# EAGLE board LCD Test board v2 (EAGLE 7.5.0)
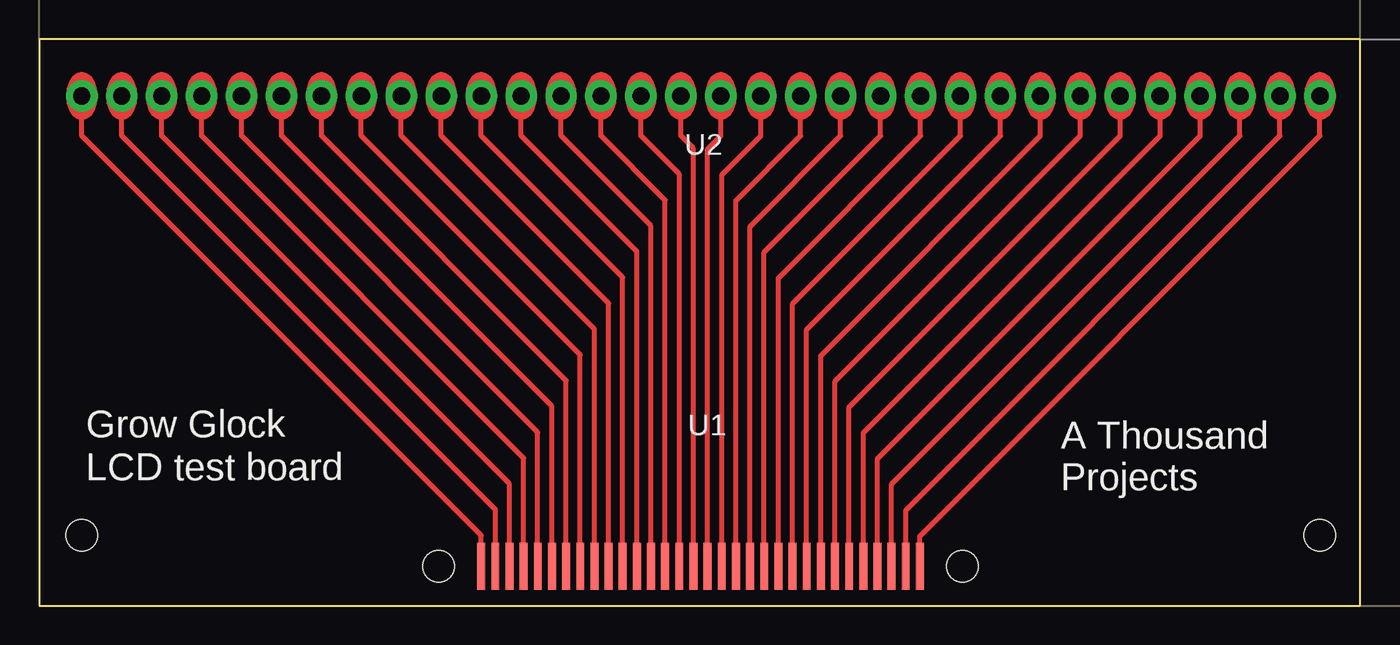
[diagram p0: board, top side]
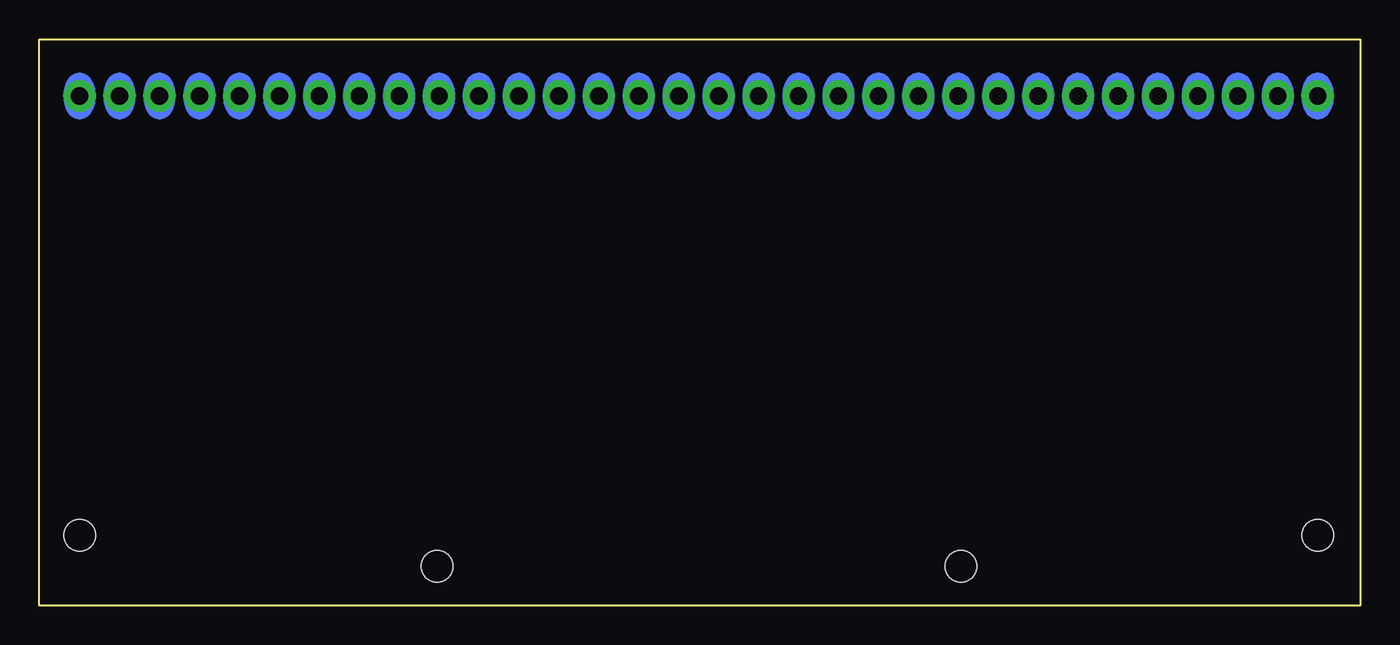
[diagram p1: board, bottom side, seen from below]

Size 84 x 36 mm. Coordinates in mm from the lower left corner, seen from the top.
Outline: 0,0 84,0 84,36 0,36 0,0
Copper layers (1++16): Top 0.035mm / dielectric 0mm / Bottom 0.035mm
Design rules "default *": minimum track width 10mil, minimum drill 0.61mm, track to track 8mil, track to pad 8mil, pad to pad 8mil, via to via 8mil, smd to smd 8mil, copper to edge 40mil, drill to drill 8mil, minimum pad ring 0mil, minimum via ring 8mil, stop-mask expansion 4mil, vias tented up to drill 19mil, thermal gap 10mil
Net classes: 0 Default: width 0.33 mm, clearance 0.33 mm
Holes 2 mm at 58.7,2.5 25.4,2.5 81.44,4.46 2.7,4.46

## Footprints (pad centres in the part's own frame; a part is rotated, then mirrored left to right if it is on the bottom)
Grow_Clock_LCD_Strip = smd 0.5 x 3: 97 -13.95,-0.15; 98 -13.05,-0.15; 99 -12.15,-0.15; 100 -11.25,-0.15; 101 -10.35,-0.15; 102 -9.45,-0.15; 103 -8.55,-0.15; 104 -7.65,-0.15; 105 -6.75,-0.15; 106 -5.85,-0.15; 107 -4.95,-0.15; 108 -4.05,-0.15; 109 -3.15,-0.15; 110 -2.25,-0.15; 111 -1.35,-0.15; 112 -0.45,-0.15; 113 0.45,-0.15; 114 1.35,-0.15; 115 2.25,-0.15; 116 3.15,-0.15; 117 4.05,-0.15; 118 4.95,-0.15; 119 5.85,-0.15; 120 6.75,-0.15; 121 7.65,-0.15; 122 8.55,-0.15; 123 9.45,-0.15; 124 10.35,-0.15; 125 11.25,-0.15; 126 12.15,-0.15; 127 13.05,-0.15; 128 13.95,-0.15
32_2.54_Strip = drill 1.1 pad 2: 1 -39.37,0; 2 -36.83,0; 3 -34.29,0; 4 -31.75,0; 5 -29.21,0; 6 -26.67,0; 7 -24.13,0; 8 -21.59,0; 9 -19.05,0; 10 -16.51,0; 11 -13.97,0; 12 -11.43,0; 13 -8.89,0; 14 -6.35,0; 15 -3.81,0; 16 -1.27,0; 17 1.27,0; 18 3.81,0; 19 6.35,0; 20 8.89,0; 21 11.43,0; 22 13.97,0; 23 16.51,0; 24 19.05,0; 25 21.59,0; 26 24.13,0; 27 26.67,0; 28 29.21,0; 29 31.75,0; 30 34.29,0; 31 36.83,0; 32 39.37,0

## Placement (x,y rotation side)
U1  GROW CLOCK LCD STRIP  [Grow_Clock_LCD_Strip]  42.05,2.65 0 top
U2  32 2.54 STRIP  [32_2.54_Strip]  42.07,32.4 0 top

## Library data of the parts
U1 U2 = common

## Nets
Net_0: U1.112 U2.16
Net_1: U1.113 U2.17
Net_2: U1.114 U2.18
Net_3: U1.115 U2.19
Net_4: U1.116 U2.20
Net_5: U1.117 U2.21
Net_6: U1.118 U2.22
Net_7: U1.119 U2.23
Net_8: U1.120 U2.24
Net_9: U1.121 U2.25
Net_10: U1.122 U2.26
Net_11: U1.123 U2.27
Net_12: U1.124 U2.28
Net_13: U1.125 U2.29
Net_14: U1.126 U2.30
Net_15: U1.127 U2.31
Net_16: U1.128 U2.32
Net_17: U1.97 U2.1
Net_18: U1.98 U2.2
Net_19: U1.99 U2.3
Net_20: U1.111 U2.15
Net_21: U1.110 U2.14
Net_22: U1.109 U2.13
Net_23: U1.108 U2.12
Net_24: U1.107 U2.11
Net_25: U1.106 U2.10
Net_26: U1.105 U2.9
Net_27: U1.104 U2.8
Net_28: U1.103 U2.7
Net_29: U1.102 U2.6
Net_30: U1.101 U2.5
Net_31: U1.100 U2.4

## Tracks (layer width: path | path; a pad name or v marks a point on that pad's centre or on a via)
Net_0
  Top 0.33: U1.112 41.6,29.06 40.8,29.86 U2.16
Net_1
  Top 0.33: U1.113 42.5,29.02 43.34,29.86 U2.17
Net_2
  Top 0.33: U1.114 43.4,27.38 45.88,29.86 U2.18
Net_3
  Top 0.33: U1.115 44.3,25.74 48.42,29.86 U2.19
Net_4
  Top 0.33: U1.116 45.2,24.1 50.96,29.86 U2.20
Net_5
  Top 0.33: U1.117 46.1,22.46 53.5,29.86 U2.21
Net_6
  Top 0.33: U1.118 47,20.82 56.04,29.86 U2.22
Net_7
  Top 0.33: U1.119 47.9,19.18 58.58,29.86 U2.23
Net_8
  Top 0.33: U1.120 48.8,17.54 61.12,29.86 U2.24
Net_9
  Top 0.33: U1.121 49.7,15.9 63.66,29.86 U2.25
Net_10
  Top 0.33: U1.122 50.6,14.26 66.2,29.86 U2.26
Net_11
  Top 0.33: U1.123 51.5,12.62 68.74,29.86 U2.27
Net_12
  Top 0.33: U1.124 52.4,10.98 71.28,29.86 U2.28
Net_13
  Top 0.33: U1.125 53.3,9.34 73.82,29.86 U2.29
Net_14
  Top 0.33: U1.126 54.2,7.7 76.36,29.86 U2.30
Net_15
  Top 0.33: U1.127 55.1,6.06 78.9,29.86 U2.31
Net_16
  Top 0.33: U1.128 56,4.42 81.44,29.86 U2.32
Net_17
  Top 0.33: U1.97 28.1,4.46 2.7,29.86 U2.1
Net_18
  Top 0.33: U1.98 29,6.1 5.24,29.86 U2.2
Net_19
  Top 0.33: U1.99 29.9,7.74 7.78,29.86 U2.3
Net_20
  Top 0.33: U1.111 40.7,27.42 38.26,29.86 U2.15
Net_21
  Top 0.33: U1.110 39.8,25.78 35.72,29.86 U2.14
Net_22
  Top 0.33: U1.109 38.9,24.14 33.18,29.86 U2.13
Net_23
  Top 0.33: U1.108 38,22.5 30.64,29.86 U2.12
Net_24
  Top 0.33: U1.107 37.1,20.86 28.1,29.86 U2.11
Net_25
  Top 0.33: U1.106 36.2,19.22 25.56,29.86 U2.10
Net_26
  Top 0.33: U1.105 35.3,17.58 23.02,29.86 U2.9
Net_27
  Top 0.33: U1.104 34.4,15.94 20.48,29.86 U2.8
Net_28
  Top 0.33: U1.103 33.5,14.3 17.94,29.86 U2.7
Net_29
  Top 0.33: U1.102 32.6,12.66 15.4,29.86 U2.6
Net_30
  Top 0.33: U1.101 31.7,11.02 12.86,29.86 U2.5
Net_31
  Top 0.33: U1.100 30.8,9.38 10.32,29.86 U2.4

## Text on the board
tPlace: Grow Glock | A Thousand | LCD test board | Projects